# Altium PCB LuxLogger_V2_pcb.PcbDoc
Units mm, origin at the board's own origin, x right, y up, seen from the top; angles counter-clockwise.
Board outline 63.83 x 29.23 mm, 4 copper layers (Layer 1, Layer 2 - GND, Layer 3 - PWR, Layer 4), stack 1.57 mm thick; 86 components, 63 nets, 285 pads, 89 vias.
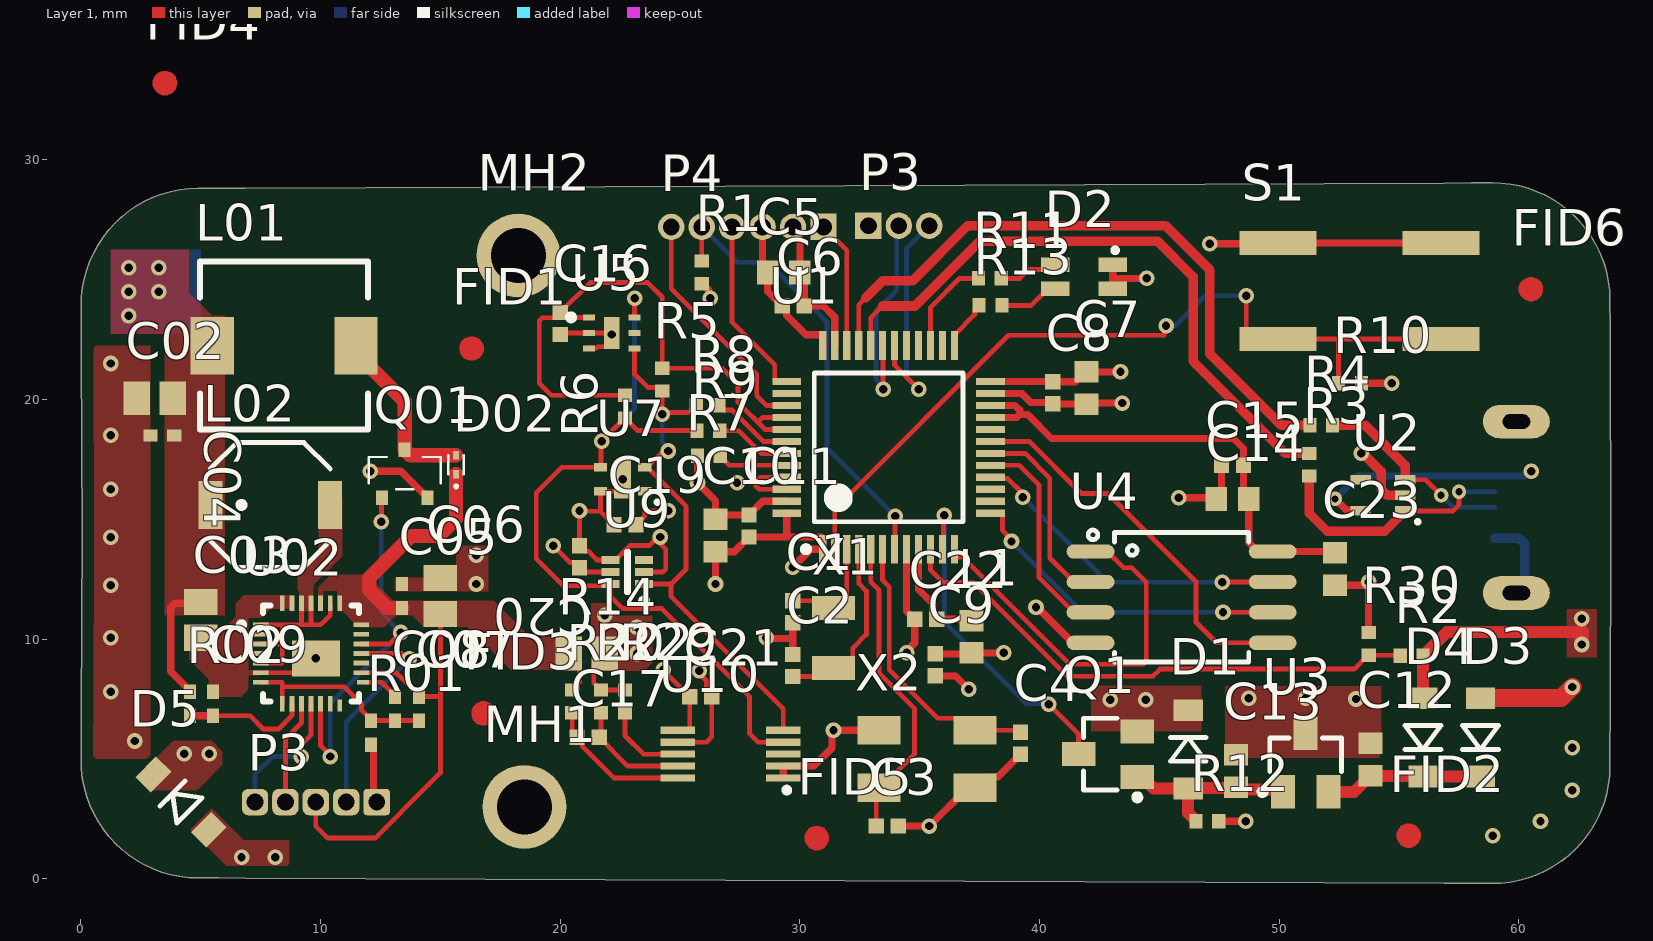
[diagram p0: Layer 1 view]
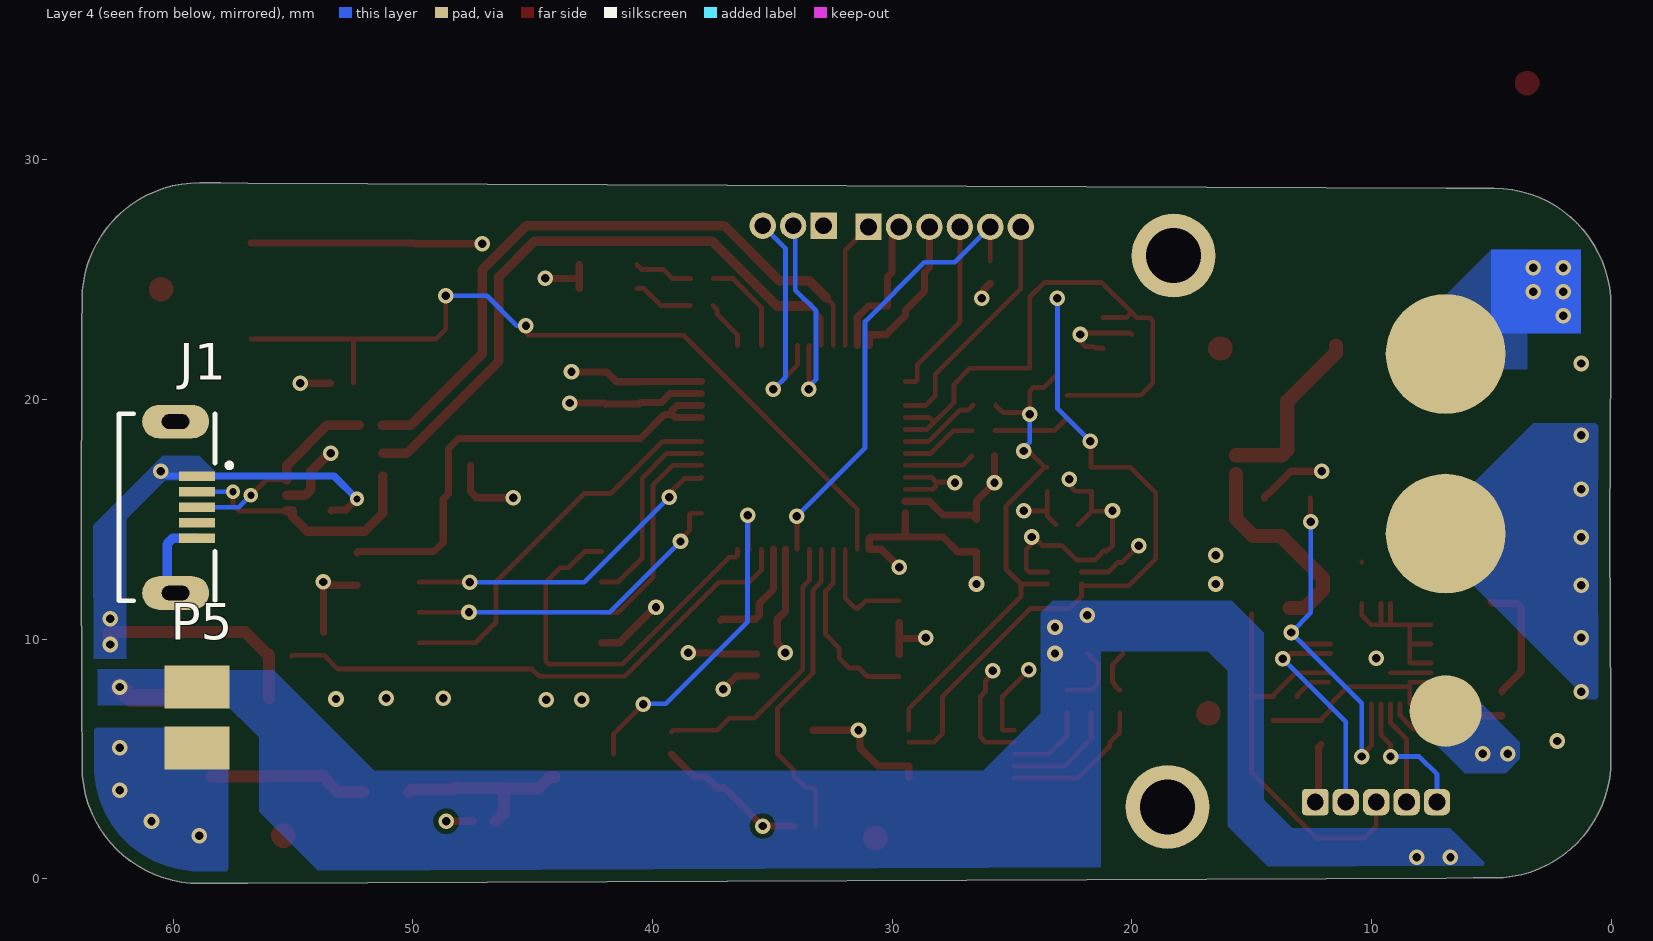
[diagram p1: Layer 4 view, seen from below]
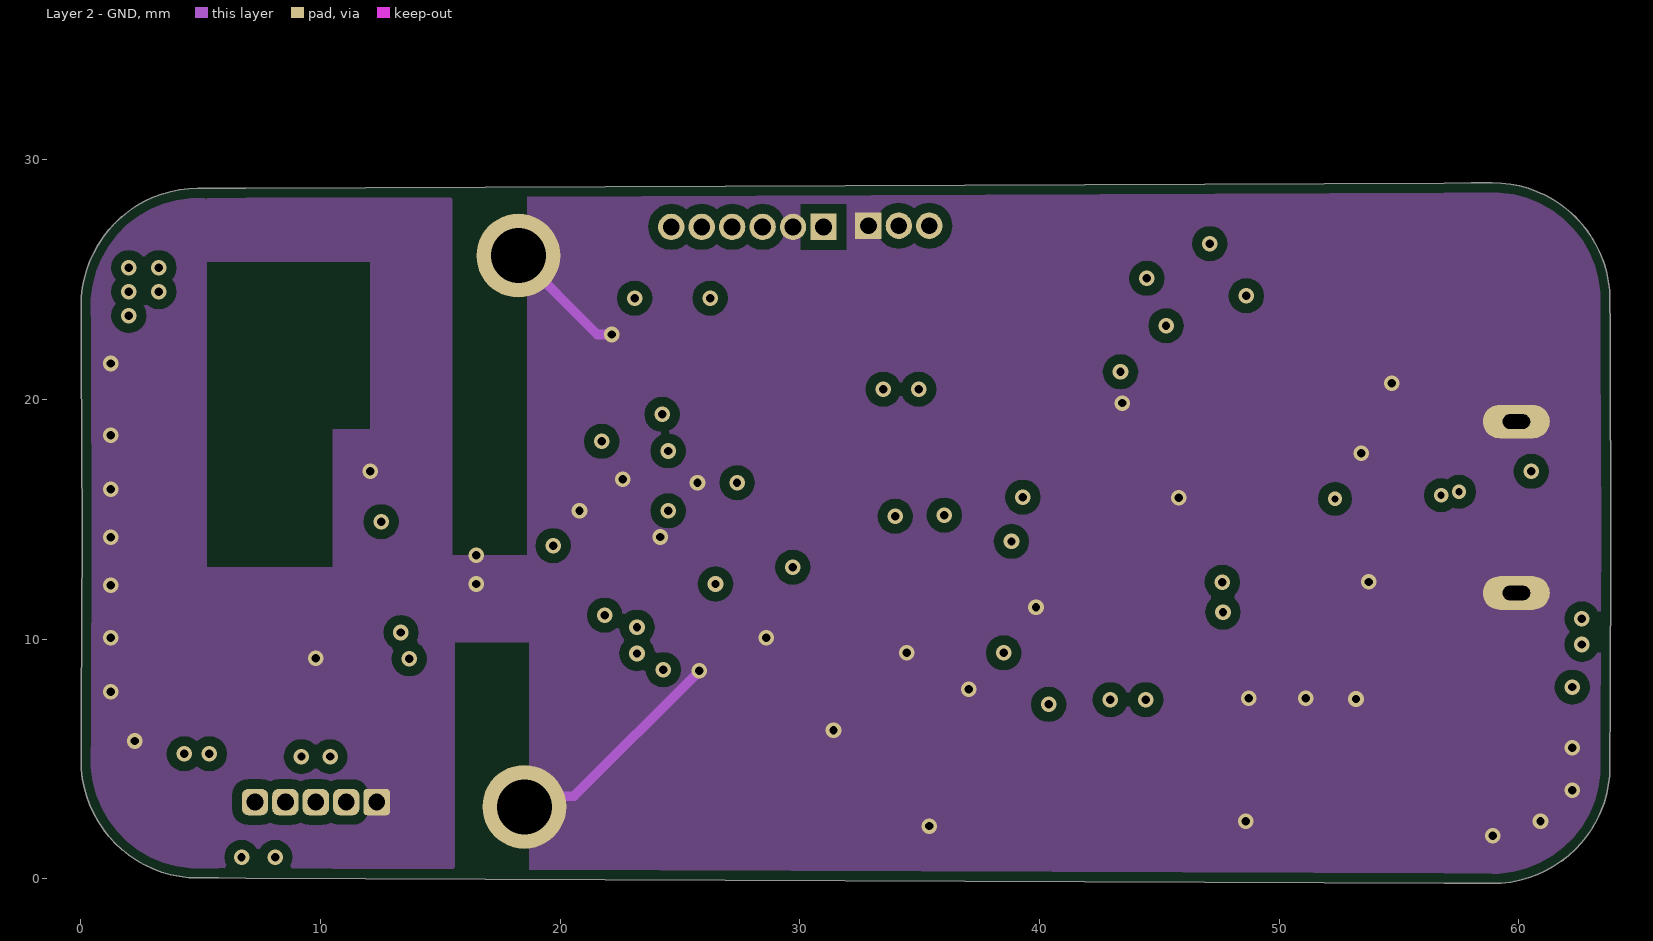
[diagram p2: Layer 2 - GND]
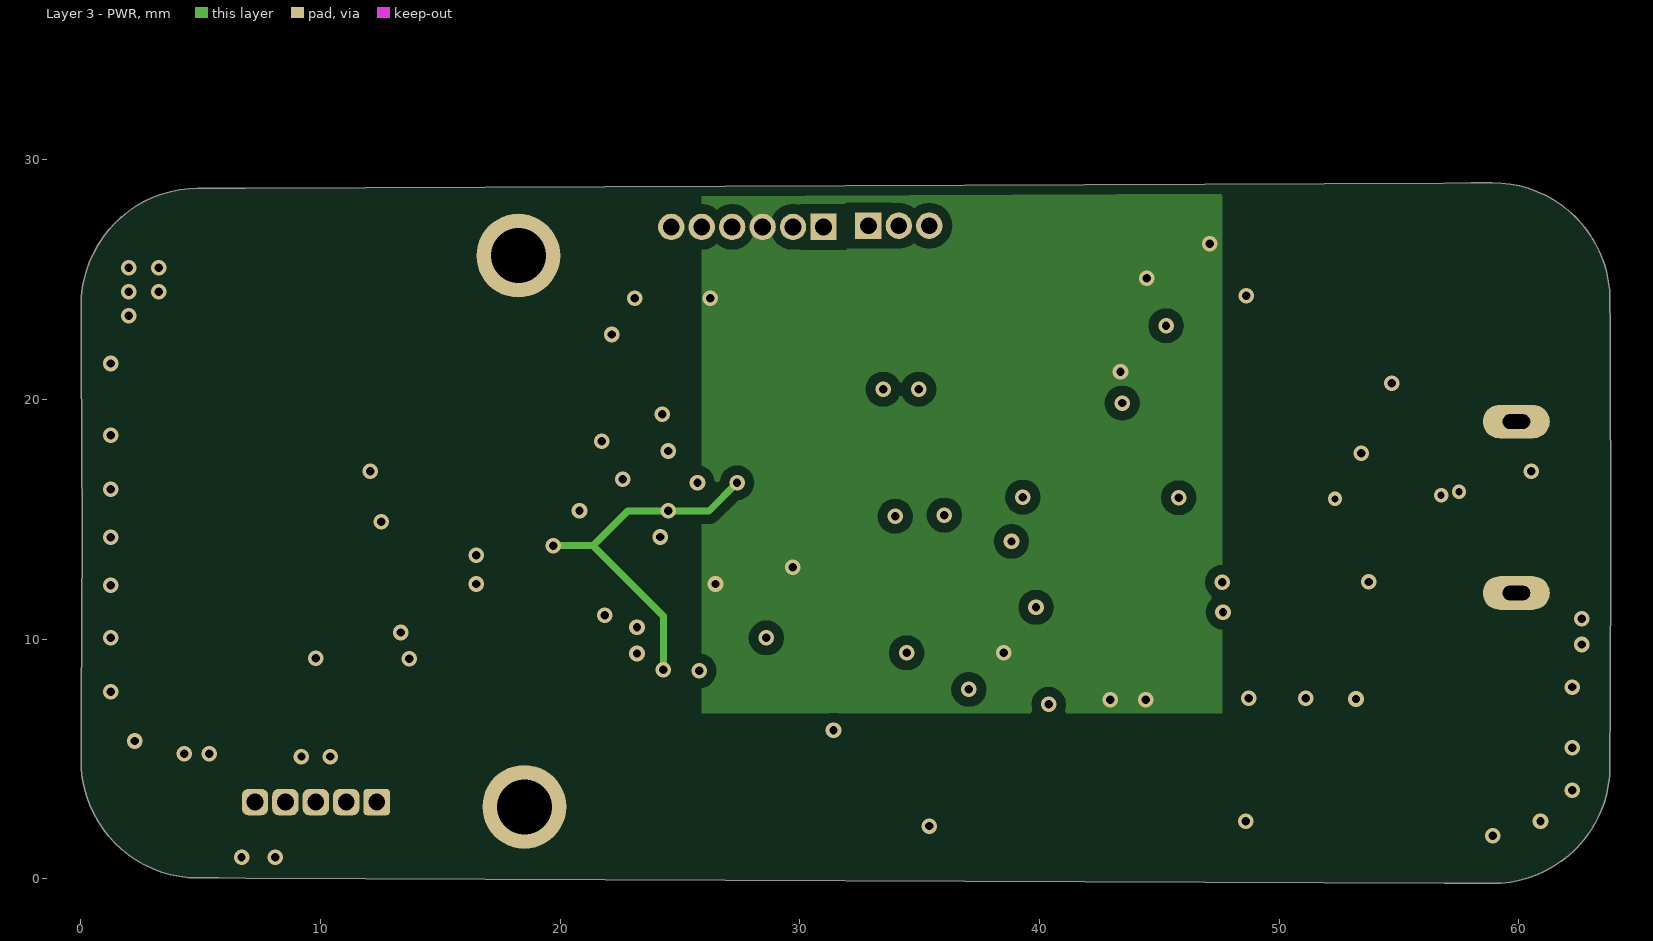
[diagram p3: Layer 3 - PWR]

## Layer stack, top to bottom
Top Solder: solder mask 0.01, Solder Resist, Dk 3.5
Layer 1: signal copper 0.035
Dielectric 1: core 0.36, FR-4, Dk 4.8
Layer 2 - GND: signal copper 0.035
Dielectric 3: prepreg 0.71, Dk 4.2
Layer 3 - PWR: signal copper 0.035
Dielectric 4: core 0.36, Dk 4.2
Layer 4: signal copper 0.035
Bottom Solder: solder mask 0.01, Solder Resist, Dk 3.5

## Board outline
4.878,0.035 cw(c4.896,4.925) 0.006,4.949 0.013,6.068 0.017,6.951 0.049,14.422 0.017,21.893 0.012,23.016 0.006,23.895 cw(c4.896,23.919) 4.878,28.809 5.998,28.811 6.881,28.815 56.881,29.027 58.004,29.032 58.883,29.037 cw(c58.907,24.148) 63.797,24.165 63.799,23.046 63.803,22.163 63.836,14.422 63.803,6.681 63.799,5.557 63.797,4.678 cw(c58.907,4.696) 58.883,-0.194 57.764,-0.187 56.881,-0.183 6.881,0.029 5.757,0.033

## Design rules (kind name [scope] priority, off if disabled: settings)
BoardOutlineClearance "BoardOutlineClearance inner layers" [OnLayer('Layer 2 - GND') OR OnLayer('Layer 3 - PWR')] p1: gap=0.4 ignorepadtopadclearanceinfootprint=FALSE
BoardOutlineClearance [OnLayer('Layer 1') OR OnLayer('Layer 4')] p2: gap=0.5 ignorepadtopadclearanceinfootprint=FALSE
Clearance "Clearance tmp112" [HasFootprint('SOTFL50P160X60-6N')] p1: gap=0.15 ignorepadtopadclearanceinfootprint=FALSE
Clearance "Clearance outer layers" [OnLayer('Layer 1') OR OnLayer('Layer 4')] p2: gap=0.2 ignorepadtopadclearanceinfootprint=FALSE
Clearance "Clearance inner layers" [OnLayer('Layer 2 - GND') OR OnLayer('Layer 3 - PWR')] p3: gap=0.4 ignorepadtopadclearanceinfootprint=FALSE
ComponentClearance "ComponentClearance power options" [HasFootprint('BU2032SM-HD-G') vs HasFootprint('JST_S2B-PH-SM4-TB') OR HasFootprint('SOD123 SODFL360X130-2N')] p1: gap=0 collisioncheckmode=3 verticalgap=0 showdistances=FALSE
ComponentClearance "ComponentClearance power options_1" [All vs HasFootprint('HOLE_PLATED_2900um')] p2: gap=0 collisioncheckmode=3 verticalgap=0 showdistances=FALSE
ComponentClearance "ComponentClearance FID" [HasFootprint('FIDUCIAL_01')] p3: gap=0 collisioncheckmode=3 verticalgap=0 showdistances=FALSE
ComponentClearance [All] p4: gap=0.2 collisioncheckmode=3 verticalgap=2540 showdistances=FALSE
DiffPairsRouting "DiffPairsRouting USB 90R diff" [InDifferentialPair('USB')] p1: maxlimit=0.3 minlimit=0.15 mostfreqgap=0.3 toplayer_minwidth=0.2 toplayer_maxwidth=0.6 toplayer_prefwidth=0.6 midlayer1_mingap=0.254 midlayer1_maxgap=0.254 midlayer1_prefgap=0.254 midlayer1_minwidth=0.381 midlayer1_maxwidth=0.381 midlayer1_prefwidth=0.381 midlayer2_mingap=0.254 midlayer2_maxgap=0.254 midlayer2_prefgap=0.254 midlayer2_minwidth=0.381 midlayer2_maxwidth=0.381 midlayer2_prefwidth=0.381 bottomlayer_minwidth=0.2 bottomlayer_maxwidth=0.6 bottomlayer_prefwidth=0.6 maxuncoupledlength=12.7
HoleSize [All] p1: absolutevalues=TRUE maxlimit=4 minlimit=0.3 maxpercent=80.000 minpercent=20.000
PlaneClearance [All] p1: clearance=0.2
PlaneConnect [All] p1: planeconnectstyle=Direct reliefexpansion=0.508 reliefentries=4 reliefconductorwidth=0.254 reliefairgap=0.254
PolygonConnect [All] p1: connectstyle=Direct reliefconductorwidth=0.3 reliefentries=4 polygonreliefangle="90 Angle" airgapwidth=0.2
RoutingVias [All] p1: holewidth=0.3 width=0.6 viastyle="Through Hole" minholewidth=0.3 minwidth=0.6 maxholewidth=0.5 maxwidth=1
SolderMaskExpansion [All] p1: expansion=0.102 istentingtop=FALSE
UnRoutedNet [All] p1: checkbadconnections=TRUE
Width [All] p1: maxlimit=2 minlimit=0.15 preferedwidth=0.2 toplayer_minwidth=0.2 bottomlayer_minwidth=0.2 minimp=50.000000 maximp=50.000000 favimp=50.000000
24 further rules are at their usual default settings.

## Classes and differential pairs
component class Sunboost: C02 C03 C04 C05 C06 C07 C08 C09 D02 L01 L02 P3 Q01 R01 R02 U02
differential pair USB: +USB_P -USB_N

## Components (designator, comment, footprint, x,y, rotation, side; value= is the part's Value field where it differs from the comment)
C1 "" CAP0402 29.7,11.14 r90 top
C02 "Cap_0805" 0805 3.075,20.05 r0 top value=22uF
C2 "" CAP0402 29.7,8.9 r270 top
C03 "Cap_0805" 0805 5,10.8 r90 top value=22uF
C3 "" CAP0402 33.64,2.2 r180 top
C04 "Cap_0402" 0402 3.4,18.5 r0 top value=100nF
C4 "" CAP0402 39.2,5.66 r90 top
C05 "Cap_0402" 0402 13.4,11.8 r270 top value=100nF
C5 "" CAP0603 29.325,25.3 r180 top
C06 "Cap_0805" 0805 15,11.8 r270 top value=22uF
C6 "" CAP0402 29.725,23.9 r180 top
C07 "Cap_0402" 0402 14.1,7.1 r90 top value=100nF
C7 "" CAP0603 41.95,20.475 r90 top
C08 "Cap_0402" 0402 13.1,7.1 r90 top value=470nF
C8 "" CAP0402 40.55,20.275 r90 top
C09 "Cap_0402" 0402 5.5,7.3 r270 top value=100nF
C9 "" CAP0402 35.65,8.925 r90 top
C10 "" CAP0603 26.475,14.322 r270 top
C11 "" CAP0402 27.875,14.722 r270 top
C12 "" CAP0603 53.8,4.975 r270 top
C13 "" CAP0603 48.2,4.5 r270 top
C14 "" CAP0603 48.05,15.85 r0 top
C15 "" CAP0402 48.05,17.25 r0 top
C16 "" CAP0402 20,23.169 r90 top
C17 "" CAP0402 21.16,5.9 r180 top
C19 "" CAP0402 22.7,14.772 r0 top
C20 "" CAP0402 20.8,13.44 r270 top
C21 "" CAP0402 25.86,7.6 r180 top
C22 "" CAP0402 35.25,10.825 r0 top
C23 "" CAP0603 52.325,12.925 r90 top
D1 "Alternative ON BAT54T1GOSCT-ND" "SOD123 SODFL360X130-2N" 46.2,5.4 r90 top
D02 "NSR0140P2" SOD-923 15.65,16.875 r90 top
D2 "" KPTBD-3216SURKCGKC 40.65,25.625 r0 top
D3 "Alternative ON BAT54T1GOSCT-ND" "SOD123 SODFL360X130-2N" 58.4,5.9 r270 top
D4 "Alternative ON BAT54T1GOSCT-ND" "SOD123 SODFL360X130-2N" 56,5.9 r270 top
D5 "Alternative ON BAT54T1GOSCT-ND" "SOD123 SODFL360X130-2N" 4.176,3.2 r135 top
FID1 "Fiducial" FIDUCIAL_02_small 16.3,22.125 r90 top
FID2 "Fiducial" FIDUCIAL_02_small 55.4,1.8 r90 top
FID3 "Fiducial" FIDUCIAL_02_small 16.8,6.9 r90 top
FID4 "Fiducial" FIDUCIAL_02_small 3.5,33.2 r90 top
FID5 "Fiducial" FIDUCIAL_02_small 30.7,1.7 r90 top
FID6 "Fiducial" FIDUCIAL_02_small 60.5,24.6 r90 top
J1 "USB3140-30-0170-1-C_REVE1" GCT_USB3140-30-0170-1-C_REVE1 60.25,15.5 r270 bottom
L01 "SRR7045-102M" SRR7045-102M 5.475,22.25 r0 top value=X
L1 "" CAP0603 37.15,10.1 r90 top
L02 "SD53-4R7-R" SD53-4R7-R 7.9,15.6 r0 top value=X
MH1 "Mounting hole" HOLE_PLATED_2300um 18.5,3 r0 top
MH2 "Mounting hole" HOLE_PLATED_2300um 18.25,26 r0 top
P3 "1x5 Header" "1x5 Header 1.27" 12.34,3.2 r180 top
P3 "" "Header 1x3 1.27" 32.855,27.25 r0 top
P4 "" "Header 1x6 1.27" 30.98,27.2 r180 top
P5 "" "2x1 blank pads_2" 59,6.73 r270 bottom
Q01 "PMV130ENE" SOT-23 12.557,15.9 r0 top
Q1 "" SOT23-3 42.7,5.2 r180 top
R01 "Res_0402" 0402 12.1,6.1 r270 top value=0
R1 "" RES0402 25.9,25.3 r270 top
R02 "Res_0402" 0402 4.55,7.3 r270 top value=51K
R2 "" RES0402 55.525,9.3 r0 top
R3 "" RES0402 51.25,17.275 r270 top
R4 "" RES0402 51.75,18.925 r0 top
R5 "" RES0402 24.25,20.825 r90 top
R6 "" RES0402 22.7,19.7 r90 top
R7 "" RES0402 26.2,17.65 r0 top
R8 "" RES0402 26.151,19.765 r0 top
R9 "" RES0402 26.176,18.69 r0 top
R10 "" RES0402 52.95,20.675 r180 top
R11 "" RES0402 37.925,25.05 r180 top
R12 "" RES0402 47,2.4 r180 top
R13 "" RES0402 37.95,23.925 r180 top
R14 "Res_0805" 0805 21.1,9.4 r180 top value=1K
R20 "" RES0402 20.5,7.4 r270 top
R22 "" RES0402 21.7,7.4 r270 top
R29 "" RES0402 22.7,7.4 r270 top
R30 "" RES0402 53.725,9.8 r270 top
S1 "" EVQQ2W02W 56.75,26.525 r180 top
U1 "" TSQFP50P900X900X160-48N 33.7,18 r90 top
U02 "Sunboost 3" 28-QFN_0.4mm 7.5,10.6 r0 top
U2 "" "SC-70 5L" 55.25,15.35 r90 top
U3 "" SOT23-3 51.1,5 r90 top
U4 "" SO_8_W 45.925,11.75 r0 top
U5 "" OPT3001 21.2,23.425 r0 top
U7 "" SHTC3 23.525,16.172 r90 top
U9 "" SOTFL50P160X60-6N 22.8,12.8 r180 top
U10 "" VSSOP-10 27.2,5.2 r180 top
X1 "" FC-135 31.4,11.3 r270 top
X2 "" ABM3B 35.3,5 r0 top

## Footprints (in the part's own frame and the unit in brackets; to place one, negate y for a bottom-side part, rotate by r counter-clockwise, add the part's x,y. Pads: shape width x height; smd on the part's side, far side on the other; paste and mask are expansions set on the pad)
"1x5 Header 1.27" [mm]
  rrect25% 1.1x1.1 hole 0.7 paste+0 mask+0: 1(0,0)
  rrect50% 1.1x1.1 hole 0.7 paste+0 mask+0: 2(1.27,0) 3(2.54,0) 4(3.81,0) 5(5.08,0)
"2x1 blank pads_2" [mm]
  rect 1.8x2.7 smd: 1(-1.27,0) 2(1.27,0)
28-QFN_0.4mm [mm]
  rect 0.65x0.2 smd mask+0.05: 1(0,0) 2(0,-0.4) 3(0,-0.8) 4(0,-1.2) 5(0,-1.6) 6(0,-2) 7(0,-2.4) 16(4.2,-2) 17(4.2,-1.6) 18(4.2,-1.2) 19(4.2,-0.8) 20(4.2,-0.4) 21(4.2,0)
  rect 0.2x0.65 smd mask+0.05: 8(0.9,-3.3) 9(1.3,-3.3) 10(1.7,-3.3) 11(2.1,-3.3) 12(2.5,-3.3) 13(2.9,-3.3) 22(3.3,0.9) 23(2.9,0.9) 24(2.5,0.9) 25(2.1,0.9) 26(1.7,0.9) 27(1.3,0.9) 28(0.9,0.9)
  rect 0.2x0.5 smd mask+0.05: 14(3.3,-3.375)
  rect 0.5x0.2 smd mask+0.05: 15(4.275,-2.4)
  rect 2x1.5 smd mask+0.05: 29(2.3,-1.4)
  silkscreen extent -0.9,-3.2 4.1,0.8, body extent 0.1,-3.2 4.1,0.8, height 0.75
0402 [mm] "Chip Capacitor, Body 1.0x0.5mm, IPC High Density"
  rect 0.6x0.5 smd: 1(-0.5,0) 2(0.5,0)
  body extent -0.55,-0.3 0.55,0.3, height 1.3
0805 [mm] "Chip Capacitor, Body 2.0x1.3mm, IPC High Density"
  rect 1.1x1.4 smd: 1(-0.75,0) 2(0.75,0)
  body extent -1.1,-0.72 1.1,0.72, height 1.4
ABM3B [mm]
  rect 1.8x1.2 smd: 1(-2,-1.2) 2(2,-1.2) 3(2,1.2) 4(-2,1.2)
  body extent -2.5,-1.6 2.5,1.6, height 1.1
CAP0402 [mm]
  rect 0.64x0.64 smd: 1(-0.46,0) 2(0.46,0)
  body extent -0.55,-0.3 0.55,0.3, height 0.6
CAP0603 [mm]
  rect 0.9x1 smd: 1(-0.675,0) 2(0.675,0)
  body extent -0.87,-0.48 0.87,0.47, height 0.85
EVQQ2W02W [mm]
  rect 3.2x1 smd: 1(0,0) 2(6.8,0) 3(6.8,4) 4(0,4)
  body extent 0,-1 6.5,5, height 2.5
FC-135 [mm]
  rect 1x1.8 smd: 1(0,0) 2(2.5,0)
  body extent -0.35,-0.75 2.85,0.75, height 0.8
FIDUCIAL_02_small [mm]
  Layer 1 region: 0,-0.5 -0.099,-0.5 -0.283,-0.424 -0.424,-0.283 -0.5,-0.099 -0.5,0 -0.5,0.099 -0.424,0.283 -0.283,0.424 -0.099,0.5 0,0.5 0.099,0.5 0.283,0.424 0.424,0.283 0.5,0.099 0.5,0 0.5,-0.099 0.424,-0.283 0.283,-0.424 0.099,-0.5 0,-0.5
  Layer 1 pour cut-out: 0,-1 -0.098,-1 -0.292,-0.962 -0.474,-0.886 -0.637,-0.777 -0.777,-0.637 -0.886,-0.474 -0.962,-0.292 -1,-0.098 -1,0 -1,0.098 -0.962,0.292 -0.886,0.474 -0.777,0.637 -0.637,0.777 -0.474,0.886 -0.292,0.962 -0.098,1 0,1 0.098,1 0.292,0.962 0.474,0.886 0.637,0.777 0.777,0.637 0.886,0.474 0.962,0.292 1,0.098 1,0 1,-0.098 0.962,-0.292 0.886,-0.474 0.777,-0.637 0.637,-0.777 0.474,-0.886 0.292,-0.962 0.098,-1 0,-1
GCT_USB3140-30-0170-1-C_REVE1 [mm]
  rect 0.4x1.5 smd: 1(-1.3,1.25) 2(-0.65,1.25) 3(0,1.25) 4(0.65,1.25) 5(1.3,1.25)
  oval 1.4x2.8 hole 0.6 slot 1.15 at 90 deg mask+0: S1(-3.575,0.36) S2(3.575,0.36)
  silkscreen extent -3.9,-2 3.9,2.7
"Header 1x3 1.27" [mm]
  rect 1.1x1.1 hole 0.7: 1(0,0)
  round 1.1 hole 0.7: 2(1.27,0) 3(2.54,0)
"Header 1x6 1.27" [mm]
  rect 1.1x1.1 hole 0.7: 1(0,0)
  round 1.1 hole 0.7: 2(1.27,0) 3(2.54,0) 4(3.81,0) 5(5.08,0) 6(6.35,0)
HOLE_PLATED_2300um [mm]
  round 3.5 hole 2.3: 1(0,0)
KPTBD-3216SURKCGKC [mm]
  rect 1.2x0.6 smd: 1(2.4,0) 2(0,0) 3(2.4,-1) 4(0,-1)
  silkscreen extent 2.4,0.5 2.6,0.7, body extent -0.4,-1.3 2.8,0.3, height 1.8
OPT3001 [mm]
  rect 0.5x0.25 smd: 1(0,0) 2(0,-0.65) 3(0,-1.3) 4(1.9,-1.3) 5(1.9,-0.65) 6(1.9,0)
  rect 0.65x1.35 smd: 7(0.95,-0.65)
  silkscreen extent -0.87,-0.12 -0.63,0.12, body extent -0.05,-1.65 1.95,0.35, height 0.62
RES0402 [mm]
  rect 0.55x0.6 smd: 1(-0.475,0) 2(0.475,0)
  body extent -0.55,-0.3 0.55,0.3, height 0.4
"SC-70 5L" [mm]
  rect 0.4x0.85 smd: 1(0,0) 2(0.65,0) 3(1.3,0) 4(1.3,1.85) 5(0,1.85)
  silkscreen extent -0.51,-0.58 -0.4,-0.47, body extent -0.45,0.25 1.75,1.6, height 1.1
SD53-4R7-R [mm]
  rect 1x2 smd mask+0.05: 1(-2.5,0) 2(2.5,0)
  silkscreen extent -2.5,-2.6 2.5,2.6, body extent -2.6,-2.6 2.6,2.6, height 3
SHTC3 [mm]
  rect 0.35x0.55 smd: 1(0,0) 2(1,0) 3(1,1.85) 4(0,1.85)
  rect 1.6x0.7 smd: 5(0.5,0.925)
  silkscreen extent -0.51,-0.58 -0.4,-0.47, body extent -0.5,-0.07 1.5,1.93, height 0.75
SO_8_W [mm]
  oval 2x0.6 smd: 1(-3.8,1.905) 2(-3.8,0.635) 3(-3.8,-0.635) 4(-3.8,-1.905) 5(3.8,-1.905) 6(3.8,-0.635) 7(3.8,0.635) 8(3.8,1.905)
  silkscreen extent -3.9,-2.7 2.8,2.8, body extent -4.05,-2.73 4.05,2.73, height 1.75
"SOD123 SODFL360X130-2N" [mm]
  rect 0.91x1.22 smd: 1(-1.635,0) 2(1.635,0)
  silkscreen extent -0.5,-0.75 0.5,0.75, body extent -1.4,-0.85 1.4,0.85, height 1.3
SOD-923 [mm]
  rect 0.36x0.25 smd mask+0.05: 1(0,0) 2(0.8,0)
  silkscreen extent -0.52,-0.33 0.8,0.33, body extent -0.12,-0.32 0.93,0.32, height 0.43
SOT23-3 [mm]
  rect 1.4x1 smd: 1(-1.375,0.95) 2(-1.375,-0.95) 3(1.075,0)
  silkscreen extent -1.5,-1.5 0.87,1.92, body extent -1.7,-1.5 1.3,1.5, height 1.1
SOT-23 [mm]
  rect 0.5x0.6 smd mask+0.05: 1(0,0) 2(1.9,0) 3(0.95,2)
  silkscreen extent -0.55,0.35 2.45,1.7, body extent -0.55,-0.25 2.45,2.25, height 1.1
SOTFL50P160X60-6N [mm]
  rect 0.75x0.35 smd: 1(-0.7,0.5) 2(-0.7,0) 3(-0.7,-0.5) 4(0.7,-0.5) 5(0.7,0) 6(0.7,0.5)
  silkscreen extent -0.83,-0.85 0.05,1.35, body extent -0.85,-0.85 0.85,0.85, height 0.6
SRR7045-102M [mm]
  rect 1.8x2.4 smd mask+0.05: 1(0,0) 2(6,0)
  silkscreen extent -0.5,-3.5 6.5,3.5, body extent -0.5,-3.5 6.5,3.5, height 4.5
TSQFP50P900X900X160-48N [mm]
  rect 1.2x0.3 smd: 1(-4.25,2.75) 2(-4.25,2.25) 3(-4.25,1.75) 4(-4.25,1.25) 5(-4.25,0.75) 6(-4.25,0.25) 7(-4.25,-0.25) 8(-4.25,-0.75) 9(-4.25,-1.25) 10(-4.25,-1.75) 11(-4.25,-2.25) 12(-4.25,-2.75) 25(4.25,-2.75) 26(4.25,-2.25) 27(4.25,-1.75) 28(4.25,-1.25) 29(4.25,-0.75) 30(4.25,-0.25) 31(4.25,0.25) 32(4.25,0.75) 33(4.25,1.25) 34(4.25,1.75) 35(4.25,2.25) 36(4.25,2.75)
  rect 0.3x1.2 smd: 13(-2.75,-4.25) 14(-2.25,-4.25) 15(-1.75,-4.25) 16(-1.25,-4.25) 17(-0.75,-4.25) 18(-0.25,-4.25) 19(0.25,-4.25) 20(0.75,-4.25) 21(1.25,-4.25) 22(1.75,-4.25) 23(2.25,-4.25) 24(2.75,-4.25) 37(2.75,4.25) 38(2.25,4.25) 39(1.75,4.25) 40(1.25,4.25) 41(0.75,4.25) 42(0.25,4.25) 43(-0.25,4.25) 44(-0.75,4.25) 45(-1.25,4.25) 46(-1.75,4.25) 47(-2.25,4.25) 48(-2.75,4.25)
  silkscreen extent -4.37,-3.1 3.1,3.57, body extent -3.5,-3.5 3.5,3.5, height 1.6
VSSOP-10 [mm]
  rect 1.45x0.3 smd: 1(-2.1,1) 2(-2.1,0.5) 3(-2.1,0) 4(-2.1,-0.5) 5(-2.1,-1) 6(2.3,-1) 7(2.3,-0.5) 8(2.3,0) 9(2.3,0.5) 10(2.3,1)
  silkscreen extent -2.35,1.4 -2.15,1.6, body extent -2.35,-1.5 2.55,1.5, height 1.15

## Part data
C1 C2 C3 C4 C6 C8 C9 C11 C15 C16 C17 C19 C20 C21 C22: library part Cap, "Capacitor", Package=0402
  C1 C2: Specification=12p/10V
  C3 C4: Specification=18p/10V
  C6 C8 C9 C11 C15 C16 C17 C19 C20 C21 C22: Specification=100n/10V
C02 C03 C04 C05 C06 C07 C08 C09: "Capacitor", LatestRevisionDate=17-Jul-2002, LatestRevisionNote="Re-released for DXP Platform.", PackageDescription="Radial Cap, Thru-Hole; 2 Leads; 0.3 in Pin Spacing", PackageReference=RAD-0.3, Published=8-Jun-2000, Publisher="Altium Limited"
C5 C7 C10 C12 C13 C14 C23: library part Cap, "Capacitor", Package=0603
  C5 C7 C10 C12 C13: Specification=10µ/10V
  C14 C23: Specification=1µ/10V
D1 D3 D4 D5: library part "D Schottky", "Schottky Diode", Manufacturer=NEXPERIA, Manufacturer PN=BAT54GW, Package=SOD123, Specification=BAT54GW
D02: "Typical INFRARED GaAs LED", LatestRevisionDate=08-Jul-2005, LatestRevisionNote="Mech Layer 1 removed.", PackageDescription="LED; 2 Leads", PackageReference=LED-0, Published=8-Jun-2000, Publisher="Altium Limited"
D2: library part LED_RG, "Red/green LED", Manufacturer=KINGBRIGHT, Manufacturer PN=KPTBD-3216SURKCGKC, Package=SMD, Specification=KPTBD-3216SURKCGKC
J1: "USB - micro B USB 2.0 Receptacle Connector 5 Position Surface Mount, Through Hole", Package=None, Availability=Warning, Check_prices=https://www.snapeda.com/parts/USB3140-30-0170-1-C/Global%20Connector%20Technology/view-part/222535/?ref=eda, DigiKey-Purchase-URL=https://snapeda.com/shop?store=DigiKey&id=222535, MF="Global Connector Technology", MP=USB3140-30-0170-1-C, Price=None, SnapEDA_Link=https://www.snapeda.com/parts/USB3140-30-0170-1-C/Global%20Connector%20Technology/view-part/222535/?ref=snap
L01 L02: "Inductor"
L1: library part Inductor, "Inductor", Manufacturer=MURATA, Manufacturer PN=BLM18AG601SN1D, Package=0603, Specification="600R 0.5A"
P3: library part "Header 3", "Header, 3-Pin", Package=Hole, Specification="1.27 pitch"
P4: library part "Header 6", "Header, 6-Pin", Package=Hole, Specification="1.27 pitch"
P5: library part "Header 2", "Header, 2-Pin", Package=SMD, Specification="SMD Pads"
Q01: "N-Channel MOSFET", LatestRevisionDate=17-Jul-2002, LatestRevisionNote="Re-released for DXP Platform.", PackageDescription="TO, Flat Index; 3 In-Line, Axial Leads; Body Dia. 4.6mm; Lead Dia. 0.5 mm (max)", PackageReference=E3, PackageVersion=1995/1996, Published=8-Jun-2000, Publisher="Altium Limited"
Q1: library part MOSFET-P, "P-Channel MOSFET", Manufacturer=ON, Manufacturer PN=FDN342P, Package=SOT-23, Specification=FDN342P
R01 R02 R14: "Resistor", LatestRevisionDate=17-Jul-2002, LatestRevisionNote="Re-released for DXP Platform.", PackageDescription="Axial Device, Thru-Hole; 2 Leads; 0.4 in Pin Spacing", PackageReference=AXIAL-0.4, Published=8-Jun-2000, Publisher="Altium Limited"
R1 R2 R3 R4 R5 R6 R7 R8 R9 R10 R11 R12 R13 R20 R22 R29 R30: library part Res2, "Resistor", Package=0402
  R1 R2 R7 R10 R12 R30: Specification=10k
  R3 R4 R8 R9: Specification=0R
  R5 R6: Specification=4k7
  R11 R13: Specification=270R
  R20 R22: Specification=5R1
  R29: Specification=10R
S1: library part SW_EVQQ2, "Switch", Manufacturer=PANASONIC, Manufacturer PN=EVQQ2W02W, Package=SMD, Specification=EVQQ2W02W
U1: library part STM32L412CB_2, "MCU", Manufacturer=ST, Manufacturer PN=STM32L412CBT6, Package=LQFP-48, Specification=STM32L412CBT6
U02: "Initvation Sunboost 3"
U2: library part RClamp0503F, "TVS array USB", Manufacturer=SEMTECH, Manufacturer PN=RClamp0503F.TCT, Package=SC70-5L, Specification=RClamp0503F
U3: library part MCP1810TxxxTT, "3V3 LDO low iq", Manufacturer=MICROCHIP, Manufacturer PN=MCP1810T33ITT, Package=SOT23, Specification=MCP1810T33ITT
U4: library part MX25R6435F_SO8, "ULTRA LOW POWER, 64M-BIT FLASH MEMORY", Manufacturer=Macronix, Manufacturer PN=MX25R6435FM2IL0, Package=SOIC-8, Specification=MX25R6435F
U5: library part OPT3001, "Lux sensor", Manufacturer=TI, Manufacturer PN=OPT3001DNP, Package=DNP-6, Specification=OPT3001
U7: library part SHTC3, "SHTC3 RH sensor", Manufacturer=SENSIRION, Package=DFN, Manufacturer PN=SHTC3, Specification=SHTC3
U9: library part TMP112A, "Temp_Sensor", Manufacturer=TI, Manufacturer PN=TMP112AIDR, Package=SOT-563, Specification=TMP112
U10: "Current and power monitor", Manufacturer=TI, Manufacturer PN=INA226AIDGS, Package=VSSOP10, Specification=INA226A
X1: "32.768 kHz Crystal", Manufacturer=EPSON, Manufacturer PN="FC-135 32.7680KA-A5", Package=SMD, Specification="32.768 kHz"
X2: "Crystal", Manufacturer=ABRACON, Manufacturer PN=ABM3B-8.000MHZ-B2-T, Package=SMD, Specification="8 MHz"

## Free pads (board coordinates)
  round 5 smd far side mask+0.05: 1(6.9,14.4) 2(6.9,21.9)
  round 3 smd far side: 3(6.9,7)

## Via types
v1: diameter 0.65, hole 0.35, Layer 1 to Layer 4, tented both sides, 79 vias
v2: diameter 0.65, hole 0.35, Layer 1 to Layer 4, 7 vias
v3: diameter 0.6, hole 0.3, Layer 1 to Layer 4, 3 vias

## Nets (pads, with @x,y where several pads share a name; then routed paths per layer and width w, separated by ;. In a path a pad name is that pad's centre, name@x,y a point inside that pad or via, vN(x,y) a via of type N, cw(c..) or ccw(c..) an arc to the next point about the centre after c; other vN are vias at no path point)
5V_USB: D4.1 J1.1 R2.2 U2.5 | length 19.4
  Layer 1 w0.3: v3(52.325,15.85) 52.782,15.393 53.357,15.393 U2.5 ; v1@60.434,17 v1(60.515,17)
  Layer 1 w0.5: D4.1 R2.2 56,9.325 56.025,9.35 56.05,9.35 56.989,10.289 62.625,10.289
  Layer 1 w0.6: v1(62.625,9.775) 62.625,10.289
  Layer 4 w0.3: v3(52.325,15.85) 53.275,16.8 J1.1 60.234,16.8 60.434,17 v1(60.515,17)
  other v1: 62.625,10.85
ACTIVATE_IV_MEASn: U1.20
BAT_Drain: D5.2 pad.3
  other v2: 4.311,5.215 5.357,5.215
BAT_MEAS: Q1.3 U1.11 | length 14.3
  Layer 1 w0.2: U1.11 35.987,13.787 35.987,15.137 v1(36.025,15.175) ; v1(40.375,7.275) 41.625,6.025 Q1.3
  Layer 4 w0.2: v1(36.025,15.175) 36.025,10.725 39.449,7.301 40.349,7.301 v1(40.375,7.275)
BUTTON: R10.2 S1.3 S1.4 U1.2 | length 34.3
  Layer 1 w0.2: U1.2 31.45,15.424 38.701,22.675 45.201,22.675 45.201,23.001 v1(45.275,23.075) ; v1(48.625,24.325) 48.625,22.925 49.025,22.525 S1.3 52.48,22.525 ; R10.2 52.475,22.52 52.48,22.525 ; S1.4 52.48,22.525
  Layer 4 w0.2: v1(45.275,23.075) 45.65,23.075 46.9,24.325 v1(48.625,24.325)
DGND: C07.1 C08.1 R01.1 U02.7 U02.8 | length 8.3
  Layer 1 w0.2: U02.7 8.4,8.2 8.4,8.015 ; U02.8 8.4,8.015 ; C07.1 C08.1 R01.1 12.1,6.65 11.7,7.05 11.7,7.3 10.985,8.015 8.4,8.015
EXT_BAT: D3.1 D5.1 P5.1 R14.1 R22.1 R29.1 | length 6.9
  Layer 1 w0.2: R14.1 21.4,8.95 21.4,8.175 21.5,8.075 21.5,8.05 21.675,7.875 R22.1 R29.1
  Layer 1 w0.75: D3.1 61.76,7.535 v1(62.225,8)
  other v2: 6.7,0.9 8.1,0.9 23.2,9.4 23.2,10.5 21.85,11
FLASH_CS: U1.12 U4.1 | length 16.4
  Layer 1 w0.2: U1.12 36.45,13.467 36.5,13.417 36.783,13.417 41.25,8.95 44.333,8.95 44.45,9.067 44.45,12.375 43.848,12.977 43.503,12.977 42.825,13.655 U4.1
FLASH_SCLK: U1.13 U4.6 | length 13.9
  Layer 1 w0.2: U1.13 38.4,15.25 38.45,15.2 38.45,14.549 38.825,14.174 v1(38.825,14.075) ; v1(47.65,11.125) 47.655,11.12 49.72,11.12 U4.6
  Layer 4 w0.2: v1(38.825,14.075) 41.775,11.125 v1(47.65,11.125)
FLASH_SIO0: U1.19 U4.5 | length 16.3
  Layer 1 w0.2: U1.19 39.563,18.25 41.738,16.075 42.85,16.075 46.525,12.4 46.525,10.7 47.38,9.845 U4.5
FLASH_SIO1: U1.18 U4.2 | length 8.3
  Layer 1 w0.2: U1.18 39.393,17.75 40.425,16.718 40.425,13.385 41.425,12.385 U4.2
FLASH_SIO2: U1.17 U4.3 | length 9
  Layer 1 w0.2: U1.17 39.15,17.25 39.975,16.425 39.975,12.565 41.425,11.115 U4.3
FLASH_SIO3: U1.16 U4.7 | length 13.7
  Layer 1 w0.2: U1.16 38,16.7 38.674,16.7 39.223,16.151 39.223,16.002 v1(39.3,15.925) ; v1(47.625,12.375) 47.63,12.38 49.72,12.38 U4.7
  Layer 4 w0.2: v1(39.3,15.925) 42.85,12.375 v1(47.625,12.375)
GND: C1.1 C2.1 C02.1 C03.1 C3.1 C04.1 C4.1 C5.1 C05.1 C6.1 C06.1 C7.1 C8.1 C9.1 C09.1 C10.1 C11.1 C12.1 C13.1 C14.1 C15.1 C16.1 C19.1 C20.1 C21.1 C22.1 C23.1 J1.5 J1.S1 J1.S2 MH1.1 MH2.1 P3.1 P4.2 P5.2 pad.1 Q01.2 R01.2 R7.1 R10.1 R12.1 R30.1 U1.8 U1.23 U1.35 U1.47 U2.2 U02.2 U02.4 U02.6 U02.27 U02.28 U02.29 U3.3 U4.4 U5.2 U5.3 U5.7 U7.4 U7.5 U9.2 U9.4 U10.1 U10.2 U10.7 X2.2 X2.4 | length 98.7
  Layer 1 w0.2: U02.6 U02.29@9.2,8.6 ; C16.1 20.066,22.775 U5.2 U5.7 v1(22.15,22.709) 22.15,22.425 21.925,22.2 21.575,22.2 21.525,22.15 21.225,22.15 U5.3 ; C19.1 21.675,15.337 ; v1(22.6,16.672) 22.6,16.422 22.35,16.172 U7.4 21.675,15.337 ; U9.2 24.28,12.8 24.397,12.917 24.397,13.753 24.175,13.975 v1(24.175,14.262) 24.067,14.262 23.705,13.9 22.9,13.9 22.3,13.3 U9.4 21.537,13.3 21.42,13.417 21.42,13.424 21.164,13.68 21.02,13.68 C20.1 v1(20.8,15.35) 20.813,15.337 21.675,15.337 ; U10.7 26.1,5.7 26.32,5.92 C21.1 26.1,7.82 26.1,8.267 25.8,8.567 v1(25.8,8.675)
  Layer 1 w0.3: v1(12.07,17) 13.357,17 14.307,16.05 14.357,16.05 14.457,15.95 Q01.2 ; R01.2 12.2,5.5 12.2,3.34 P3.1@12.34,3.2 ; R7.1 v1(25.725,16.525) 26.475,15.775 C10.1 26.66,15.182 C11.1 28.443,15.75 U1.47 ; v1(28.6,10.05) 28.622,10.028 29.7,10.028 ; U10.1 U10.2 30.575,4.7 31.343,5.468 31.343,6.143 v1(31.4,6.2) X2.4 ; C2.1 29.7,10.028 ; C1.1 29.7,10.028 ; P4.2 29.71,26.984 30,26.694 C5.1 30.185,25.115 C6.1 30.98,23.9 31.45,23.43 U1.35 ; C3.1 v1(35.4,2.2) 37,3.8 X2.2 37.75,4.25 38.25,4.25 C4.1 ; v1(34.45,9.425) 34.45,9.506 34.79,9.846 C22.1 34.45,11.165 U1.8 ; C9.1 36.485,8.465 v1(37.05,7.9) ; U1.23 39.258,20.25 39.633,19.875 40.49,19.875 C8.1 41.935,19.815 C7.1 42,19.85 v1(43.45,19.85) ; v1(39.85,11.325) 39.897,11.325 41.377,9.845 U4.4 ; v1(45.8,15.9) 47.325,15.9 47.59,16.165 C15.1 ; R12.1 v1(48.6,2.4) ; C23.1 53.509,12.25 53.644,12.385 v1(53.725,12.385) R30.1 ; R10.1 v1(54.7,20.675)
  Layer 1 w0.4: v1(53.425,17.75) 53.493,17.75 53.618,17.625 53.626,17.625 54.25,17.001 54.25,16.25 54.5,16 U2.2
  Layer 2 - GND w0.4: MH2.1 21.541,22.709 v1(22.15,22.709) ; MH1.1 18.949,3.449 20.574,3.449 v1(25.8,8.675)
  Layer 4 w0.4: J1.5 60.016,14.2 60.25,13.966 60.25,12.285 J1.S2
  other v1: 58.9,1.8 60.9,2.4 62.225,3.7 62.225,5.46 2.25,5.75 53.2,7.5 48.725,7.535 51.1,7.535 1.25,7.8 9.8,9.2 1.25,10.05 1.25,12.25 16.5,12.3 16.5,13.5 1.25,14.25 1.25,16.25 1.25,18.5 1.25,21.5
I2C1_SCL: R5.1 R8.1 U5.4 U7.2 U9.1 U10.5 | length 22.9
  Layer 1 w0.2: U5.4 23.1,21.05 23.65,20.5 24.1,20.5 R5.1 v1(24.25,19.375) 24.325,19.45 25.361,19.45 25.476,19.565 25.501,19.565 25.676,19.74 R8.1 ; U9.1 24.625,12.3 ; U7.2 U7.2@23.625,17.172 ; v1(24.5,17.85) 24.423,17.773 24.227,17.773 U7.2@23.625,17.172 ; U10.5 29.3,7.09 24.625,11.765 24.625,12.3 ; U7.2@23.625,17.172 25.25,15.547 25.25,12.925 24.625,12.3
  Layer 4 w0.2: v1(24.25,19.375) 24.25,18.208 24.5,17.958 v1(24.5,17.85)
I2C1_SDA: R6.1 R9.1 U5.6 U7.3 U9.6 U10.4 | length 33.7
  Layer 1 w0.2: U5.6 v1(23.1,24.225) ; R9.1 25.69,18.7 23.225,18.7 R6.1 22.675,19.225 21.725,18.275 v1(21.725,18.25) 21.7,18.225 21.7,17.197 U7.3 20.067,17.172 19,16.104 19,13.35 20.125,12.225 22.025,12.225 U9.6 22.1,12.225 22.1,11.775 22.6,11.275 24.225,11.275 27.9,7.6 27.9,6.05 28.25,5.7 U10.4
  Layer 4 w0.2: v1(21.725,18.25) 23.1,19.625 v1(23.1,24.225)
I_MEAS: U1.14
ICSP: P3.2@11.07,3.2 U02.18 | length 9.2
  Layer 1 w0.2: U02.18 13.367,9.4 13.592,9.175 v1(13.7,9.175)
  Layer 4 w0.2: P3.2@11.07,3.2 11.07,6.545 v1(13.7,9.175)
ICSPCLK: P3.4 U02.10 | length 4.4
  Layer 1 w0.2: P3.4 8.53,5.83 9.2,6.5 U02.10
ICSPDAT: P3.5 U02.11 | length 5.8
  Layer 1 w0.2: v1(9.2,5.1) 9.2,5.6 9.6,6 U02.11
  Layer 4 w0.2: P3.5 7.26,4.36 8,5.1 v1(9.2,5.1)
LED_Gn: R13.2 U1.25 | length 2.1
  Layer 1 w0.2: U1.25 36.45,22.7 37.3,23.55 37.3,23.75 R13.2
LED_Rn: R11.2 U1.27 | length 4.1
  Layer 1 w0.2: U1.27 35.45,23.843 36.657,25.05 R11.2
MCU_DEBUG_RX: P3.2@34.125,27.25 U1.31 | length 9.2
  Layer 1 w0.2: U1.31 33.463,22.238 33.463,20.438 v1(33.475,20.425)
  Layer 4 w0.2: v1(33.475,20.425) 33.475,20.533 33.17,20.838 33.17,23.695 34.04,24.565 34.04,27.165 P3.2@34.125,27.25
MCU_DEBUG_TX: P3.3@35.395,27.25 U1.30 | length 9.7
  Layer 1 w0.2: U1.30 33.95,21.425 v1(34.95,20.425)
  Layer 4 w0.2: v1(34.95,20.425) 34.44,20.935 34.44,26.295 P3.3@35.395,27.25
NetC1_2: C1.2 U1.3 X1.1 | length 4.6
  Layer 1 w0.2: C1.2 31.1,11.6 X1.1 31.55,11.3 31.95,11.7 U1.3
NetC2_2: C2.2 U1.4 X1.2 | length 7.7
  Layer 1 w0.2: C2.2 31.04,8.44 X1.2 31.8,8.8 32.2,9.2 32.2,9.626 32.77,10.196 32.77,12.005 32.45,12.325 U1.4
NetC3_2: C3.2 U1.5 X2.1 | length 13.1
  Layer 1 w0.2: U1.5 32.95,12.391 33.3,12.041 33.3,8.584 34.775,7.109 34.775,5.2 34.1,4.525 34.1,4.3 33.6,3.8 X2.1 33.18,3.68 C3.2
NetC4_2: C4.2 U1.6 X2.3 | length 11.7
  Layer 1 w0.2: U1.6 33.45,12.456 33.725,12.181 33.725,8.725 35.75,6.7 36.8,6.7 X2.3 39.12,6.2 C4.2
NetC08_2: C08.2 U02.15 | length 1.6
  Layer 1 w0.2: U02.15 12.55,8.2 13.1,7.65 C08.2
NetC09_2: C09.2 R02.2 U02.9 | length 5.2
  Layer 1 w0.2: C09.2 7.06,6.8 7.61,6.25 8.25,6.25 8.8,6.8 U02.9
  Layer 1 w0.3: R02.2 C09.2
NetC12_2: C12.2 D3.2 D4.2 U3.2 | length 6.7
  Layer 1 w0.5: U3.2 53.125,3.625 53.55,4.05 53.55,4.1 53.75,4.3 C12.2 53.818,4.282 55.982,4.282 D4.2 D3.2
NetC13_2: C13.2 D1.1 Q1.1 R12.2 U3.1 | length 7.9
  Layer 1 w0.5: Q1.1 44.275,4.25 44.76,3.765 D1.1 ; R12.2 46.525,2.425 46.5,2.45 46.493,2.45 46.2,2.743 D1.1 ; U3.1 50.05,3.725 48.3,3.725 C13.2 48.17,3.795 46.23,3.795 D1.1
NetC22_2: C22.2 L1.2 U1.9 | length 4.7
  Layer 1 w0.3: U1.9 34.95,12.075 35.54,11.485 35.54,10.995 C22.2 37.1,10.825 L1.2
NetD02_2: D02.2 L01.2 Q01.3 | length 7.4
  Layer 1 w0.6: L01.2 11.475,21.95 13.507,19.918 Q01.3 13.732,17.675 D02.2
NetD2_2: D2.2 R11.1 | length 2.5
  Layer 1 w0.2: R11.1 39.175,25.05 39.55,25.425 40.45,25.425 D2.2
NetD2_4: D2.4 R13.1 | length 2.5
  Layer 1 w0.2: R13.1 39.65,23.925 40.35,24.625 D2.4
NetJ1_2: J1.2 R3.2 U2.1 | length 10.7
  Layer 1 w0.2: U2.1 57.25,15.35 57.5,15.6 v3(57.5,16.15)
  Layer 1 w0.4: R3.2 51.25,15.25 52,14.5 54.4,14.5 55.025,15.125 55.025,15.35 U2.1
  Layer 4 w0.2: v3(57.5,16.15) J1.2
NetJ1_3: J1.3 R4.2 U2.3 | length 8.5
  Layer 1 w0.2: U2.3 56.1,16.65 v3(56.75,16)
  Layer 1 w0.4: R4.2 53.575,18.925 55.25,17.25 U2.3
  Layer 4 w0.2: v3(56.75,16) 57.25,15.5 J1.3
NetL02_2: L02.2 U02.1 U02.3 U02.5 U02.23 U02.25 U02.26 | length 8.8
  Layer 1 w0.2: U02.5 8.4,9 8.4,9.8 ; U02.3 8.4,9.8 ; U02.1 8.4,10.6 ; U02.26 9.2,10.6 ; U02.25 9.6,10.6 ; U02.23 10.4,11 10,10.6 9.6,10.6 ; 8.4,9.8 8.4,10.6 ; 8.4,10.6 9.2,10.6 ; 9.2,10.6 9.6,10.6
NetR8_2: R8.2 U1.42 | length 3.5
  Layer 1 w0.2: R8.2 26.626,19.74 26.801,19.565 27.16,19.565 28.475,18.25 U1.42
NetR9_2: R9.2 U1.43 | length 3.2
  Layer 1 w0.2: R9.2 27.443,18.69 28.383,17.75 U1.43
NetR29_2: R29.2 U10.8 | length 3.5
  Layer 1 w0.2: R29.2 22.7,5.975 23.475,5.2 U10.8
PA15: U1.38
PH3: R7.2 U1.44 | length 3
  Layer 1 w0.2: R7.2 26.675,17.625 27.05,17.25 U1.44
PWM: Q01.1 U02.12 U02.19 | length 16.6
  Layer 1 w0.2: U02.12 10,5.549 10.4,5.149 v1(10.4,5.1) ; U02.19 12.875,9.8 v1(13.35,10.275) ; v1(12.525,14.9) 12.541,14.916 12.541,15.884 Q01.1
  Layer 4 w0.2: v1(10.4,5.1) 10.4,7.325 v1(13.35,10.275) 12.525,11.1 v1(12.525,14.9)
RESET: P4.5 R1.1 U1.7 | length 19
  Layer 1 w0.2: R1.1 P4.5 ; U1.7 33.963,13.762 33.963,15.112 v1(33.975,15.125)
  Layer 4 w0.2: P4.5 27.375,25.725 28.65,25.725 31.125,23.25 31.125,17.975 v1(33.975,15.125)
SENS_I_+: C17.2 R20.2 U10.10 | length 6.1
  Layer 1 w0.2: R20.2 20.5,6.1 C17.2 20.92,5.68 20.92,5.536 22.256,4.2 U10.10
SENS_I_-: C17.1 R22.2 U10.9 | length 4.8
  Layer 1 w0.2: R22.2 21.7,5.98 C17.1 22.82,4.7 U10.9
Solar+: C02.2 C03.2 C04.2 L01.1 L02.1 pad.2 R02.1 | length 5.2
  Layer 1 w0.3: R02.1 4.55,7.85 3.75,8.65 3.75,11.324 3.926,11.5 4.95,11.5 C03.2
  other v1: 2,23.5 2,24.5 3.25,24.5 2,25.5 3.25,25.5
SPI2_MOSI: U1.28
SPI2_SCK: U1.26
SWCLK: P4.4 U1.37 | length 7.7
  Layer 1 w0.2: P4.4 27.17,23.23 28.95,21.45 28.95,20.8 29,20.75 U1.37
SWDIO: P4.1 U1.34 | length 5.4
  Layer 1 w0.2: P4.1 31.95,26.23 U1.34
SWO: P4.6 U1.39 | length 9.9
  Layer 1 w0.2: P4.6 24.63,24.62 28.2,21.05 28.2,20.15 28.6,19.75 U1.39
USB_N: R3.1 U1.32 | length 26.5
  Layer 1 w0.2: U1.32 32.95,23.4 33.45,23.9
  Layer 1 w0.4: 33.45,23.9 34.8,23.9 37.508,26.608 44.917,26.608 46.407,25.118 46.407,21.593 50.25,17.75 R3.1
USB_P: R4.1 U1.33 | length 27.4
  Layer 1 w0.2: U1.33 32.45,23.95 32.75,24.25
  Layer 1 w0.4: 32.75,24.25 33.45,24.95 34.7,24.95 37,27.25 45.25,27.25 47.1,25.4 47.1,21.9 50.075,18.925 R4.1
USB_SENSE: R2.1 R30.2 U1.10 | length 22.7
  Layer 1 w0.2: U1.10 35.45,12.875 35.95,12.375 37.225,12.375 41.15,8.45 44.725,8.45 45.025,8.75 53.125,8.75 53.7,9.325 R30.2 55.025,9.325 R2.1
V_MEAS: U1.15
VCC: C05.2 C06.2 C07.2 D02.1 P3.3@9.8,3.2 R14.2 R20.1 U02.16 U02.21 U02.22 U02.24 | length 28.5
  Layer 1 w0.2: P3.3@9.8,3.2 9.8,2.2 10.3,1.7 12.284,1.7 14.5,3.916 15,4.416 15,7.6 ; U02.16 13.15,8.6 14.1,7.65 C07.2 15,7.6 ; C06.2 15,7.6 ; R14.2 20.8,8.95 20.8,8.2 20.7,8.1 20.7,8.05 20.525,7.875 R20.1 R20.1@20.475,7.875
  Layer 1 w0.6: C05.2 12.775,11.3 12.024,12.051 12.024,12.549 13.775,14.3 14.925,14.3 15.65,15.025 D02.1
VDD: C5.2 C6.2 C7.2 C8.2 C9.2 C10.2 C11.2 D1.2 D2.1 D2.3 L1.1 P4.3 Q1.2 R1.2 S1.1 S1.2 U1.1 U1.24 U1.36 U1.48 | length 36.8
  Layer 1 w0.3: R1.2 25.925,24.825 26.193,24.557 26.193,24.282 v1(26.25,24.225) ; v1(26.475,12.3) C10.2 27.26,13.647 C11.2 29.45,14.262 ; P4.3 28.44,25.51 C5.2 28.65,24.515 C6.2 29.435,23.73 29.435,23.515 30.25,22.7 30.95,22.7 U1.36 ; U1.48 29.45,14.262 ; v1(29.7,13) 30.45,13.75 U1.1 30.95,14.2 30.888,14.262 29.45,14.262 ; C9.2 37.11,9.385 L1.1 v1(38.5,9.425) ; U1.24 40.535,20.75 C8.2 41.485,20.735 41.9,21.15 C7.2 v1(43.375,21.15) ; D2.3 43.05,25.05 ; D2.1 43.05,25.05 ; v1(44.475,25.05) 43.05,25.05 ; v1(47.1,26.5) 49.925,26.5 S1.2 S1.1
  other v1: 42.95,7.475 44.425,7.475
VDD_FLASH: C14.2 C15.2 C23.2 U1.21 U1.22 U4.8 | length 20.5
  Layer 1 w0.3: U1.21 39.05,19.25 39.175,19.375 ; U1.22 38.975,19.75 39.175,19.55 39.175,19.375 ; C23.2 52.27,13.655 U4.8 49.106,13.655 48.725,14.036 C14.2 48.51,16.065 C15.2 48.51,17.95 48.085,18.375 40.5,18.375 39.5,19.375 39.175,19.375
VDD_SENSORS_FAST: C19.2 C20.2 C21.2 U1.45 U1.46 U7.1 U9.5 U10.6 | length 27.7
  Layer 1 w0.2: v1(19.7,13.9) 20.4,13.2 20.58,13.2 C20.2 20.98,12.8 U9.5 ; C19.2 23.525,15.137 23.525,15.35 ; U7.1 23.525,15.35 ; v1(24.3,8.725) 24.3,8.7 C21.2 25.4,6.25 25.35,6.2 U10.6 ; v1(24.5,15.35) 23.525,15.35 ; v1(27.375,16.525) 27.405,16.555 28.158,16.555 ; U1.46 28.297,16.25 28.158,16.389 28.158,16.555 ; U1.45 28.353,16.75 28.158,16.555
  Layer 3 - PWR w0.3: v1(19.7,13.9) 21.363,13.9 ; v1(24.3,8.725) 24.3,10.963 21.363,13.9 ; v1(27.375,16.525) 26.2,15.35 v1(24.5,15.35) 22.813,15.35 21.363,13.9
VDD_SENSORS_SLOW: C16.2 R5.2 R6.2 U1.40 U1.41 U5.1 | length 24.6
  Layer 1 w0.2: U5.1 20.204,23.425 C16.2 ; R6.2 19.625,20.175 19.125,20.675 19.125,23.292 19.242,23.409 19.78,23.409 C16.2 ; 28.283,19.09 28.443,19.25 U1.40 ; U1.41 28.541,18.75 27.412,19.879 27.412,20.637 26.749,21.3 R5.2 24.25,24.275 23.65,24.875 21.246,24.875 C16.2
pads on no net: J1.4 U1.29 U2.4 U02.13 U02.14 U02.17 U02.20 U5.5 U9.3 U10.3

## Polygon pours and split planes (outlines as drawn)
BAT_Drain on Layer 1 "NONET_L-01_P-001" (solid, pour order 27): 3.1,5 3.85,5.75 5.45,5.75 5.9,5.3 5.9,4.756 4.844,3.7 2.9,3.7 2.9,4 2.6,4.3
EXT_BAT on Layer 1 "NONET_L-01_P-001" (solid, pour order 26): 6.394,0.2 4.55,2.044 5.406,2.9 5.5,2.9 6.8,1.6 8.7,1.6 8.7,0.2
EXT_BAT on Layer 1 "NONET_L-01_P-001" (solid, pour order 22): 21.3,10 21.3,11.5 23.617,11.5 23.842,11.275 23.842,9.017 23.5,8.675 21.4,8.675
5V_USB on Layer 1 "NONET_L-01_P-001" (solid, pour order 21): 62,11.25 63.25,11.25 63.25,9.25 62,9.25
Solar+ on Layer 1 "SOLAR+_L01_P016" (solid, pour order 16): 1.25,22.75 1.25,26.25 4.5,26.25 4.5,24.475 5.475,23.5 5.475,22.75
GND on Layer 1 "GND_L01_P014" (solid, pour order 14): 13.1,12.55 15,12.55 15,13 15.65,13 15.65,13.9 17,13.9 17,12 13.1,12
GND on Layer 1 "GND_L01_P013" (solid, pour order 13): 2.9,22.25 2.9,5 -0.75,5 -0.75,22.25
VDD on Layer 1 "VDD_L01_P008" (solid, pour order 8): 46.75,7.4 46.75,8.05 42.15,8.05 42.15,6.15 46.749,6.15 46.749,7.255
GND on Layer 1 "GND_L01_P007" (solid, pour order 7): 54.16,5.056 47.75,5.056 47.75,8.025 54.25,8.025 54.25,5.325
VCC on Layer 1 "VCC_L01_P004" (solid, pour order 4): 9.9,11.3 10.775,11.3 11.575,10.5 12.65,10.5 13.15,11 13.825,11 14.3,10.525 16.125,10.525 17.925,8.725 20.775,8.725 20.775,10.05 20.725,10.1 18.725,10.1 17.225,11.6 13.025,11.6 11.95,12.675 10.375,12.675 9.9,12.2
GND on Layer 1 "GND_L01_P003" (solid, pour order 3): 8.887,11.822 6.791,11.822 6.468,11.498 6.468,10.932 6.037,10.501 4.51,10.501 4.51,9.143 5.322,8.332 5.322,7.595 6.69,7.595 7.575,8.479 7.575,10.921 7.914,11.26 8.888,11.26
NetL02_2 on Layer 1 "NETL02_2_L01_P002" (solid, pour order 2): 10,15.9 9.925,15.9 9.925,13.5 9.051,12.626 9.051,11.153 9.702,11.153 9.702,12.252 10.9,13.45 10.9,15.883
Solar+ on Layer 1 "SOLAR+_L01_P000" (solid, pour order 0): 3.5,23.5 3.5,11 5.998,11 5.998,23.5
BAT_Drain on Layer 4 "NONET_L-01_P-001" (solid, pour order 28): 6,7.9 3.8,5.7 3.8,5 4.4,4.4 6.1,4.4 7.9,6.2 7.3,6.8 7.3,7.8
EXT_BAT on Layer 4 "NONET_L-01_P-001" (solid, pour order 25): 21.85,11.6 15.825,11.6 14.5,10.275 14.5,3.3 13.3,2.1 6.7,2.1 5.2,0.6 5.2,-1.2 12.6,-1.2 16,2.2 16,8.675 16.825,9.5 22.3,9.5 22.3,10.6 22.9,11.2
EXT_BAT on Layer 4 "NONET_L-01_P-001" (solid, pour order 24): 55.8,8.7 51.6,4.5 26.2,4.5 23.8,6.9 23.8,11.1 23.3,11.6 21.3,11.6 21.3,-0.2 22.5,-1.4 52.2,-1.4 56.4,2.8 56.4,5.9 58,7.5 60.2,7.5 60.2,8.7
GND on Layer 4 "GND_L04_P020" (solid, pour order 20): 7.75,16.25 6,16.25 3.25,19 0,19 0,7.5 1,7.5 6.75,13.25 8.25,13.25
Solar+ on Layer 4 "SOLAR+_L04_P015" (solid, pour order 15): 8.75,22.5 5,26.25 3.5,26.25 3.5,21.25 8.75,21.25
GND on Layer 4 "GND_L04_P011" (solid, pour order 11): 63.5,6.3 63.5,0 57.7,0 57.7,6.3
EXT_BAT on Layer 4 "EXT_BAT_L04_P006" (solid, pour order 6): 58.55,8.675 58.55,7.25 63.15,7.25 63.15,8.75 58.65,8.75
5V_USB on Layer 4 "5V_USB_L04_P005" (solid, pour order 5): 58.258,17 58.908,17.65 60.425,17.65 63.325,14.75 63.325,9.175 61.95,9.175 61.95,15 60.325,16.625 58.25,16.625
GND on Layer 2 - GND "GND_L02_P009" (solid, pour order 9): 15.425,13.5 18.625,13.5 18.625,29.85 65.475,29.85 65.475,-1.95 18.7,-1.95 18.7,9.875 15.6,9.875 15.6,-2.175 10.5,-2.175 10.5,13.5
GND on Layer 2 - GND "GND_L02_P019" (solid, pour order 19): 5.25,13 5.25,29.5 -1.5,29.5 -1.5,-1.25 12.75,-1.25 12.75,13
GND on Layer 2 - GND "GND_L02_P018" (solid, pour order 18): 10.5,11 10.5,18.75 12.07,18.75 12.07,25.75 5.25,25.75 5.25,31 15.5,31 15.5,11
VDD on Layer 3 - PWR "VDD_L03_P012" (solid, pour order 12): 25.9,6.9 25.9,29.6 47.625,29.6 47.625,6.9

## Other copper
Layer 4:
  rectangle net Solar+: 1.25,22.75 5,26.25

## Silkscreen, mask and mechanical layers (free items; w line width, h text height)
Mechanical 1:
  circle w0.013: c6.91,21.922 r2.5
  circle w0.013: c6.942,14.422 r2.5
  circle w0.013: c6.91,6.922 r2.5
  circle w0.013: c6.91,6.922 r2.5
  circle w0.013: c6.942,14.422 r2.5
  circle w0.013: c6.91,21.922 r2.5
  lines w0.013: 58.883,-0.194 ccw(c58.907,4.696) 63.797,4.678 63.799,5.557 63.803,6.681 63.836,14.422 63.803,22.163 63.799,23.046 63.797,24.165 ccw(c58.907,24.148) 58.883,29.037 ; 58.883,-0.194 57.764,-0.187 56.881,-0.183 6.881,0.029 5.757,0.033 4.878,0.035 cw(c4.896,4.925) 0.006,4.949 0.013,6.068 0.017,6.951 0.049,14.422 0.017,21.893 0.012,23.016 0.006,23.895 cw(c4.896,23.919) 4.878,28.809 5.998,28.811 6.881,28.815 56.881,29.027 58.004,29.032 58.883,29.037

## Text inside footprints (layer, text, board x,y; h text height)
D1: Assembly top "A" at 46.807,3.412 h0.7 r90
D3: Assembly top "A" at 57.793,7.888 h0.7 r270
D4: Assembly top "A" at 55.393,7.888 h0.7 r270
D5: Assembly top "A" at 6.011,2.224 h0.7 r135